# Altium PCB PCB_Steering_Wheel_REDO.PcbDoc
Units mm, origin at the board's own origin, x right, y up, seen from the top; angles counter-clockwise.
Board outline 165.1 x 52.45 mm, 2 copper layers (Top Layer, Bottom Layer); 9 components, 7 nets, 38 pads, 8 vias.
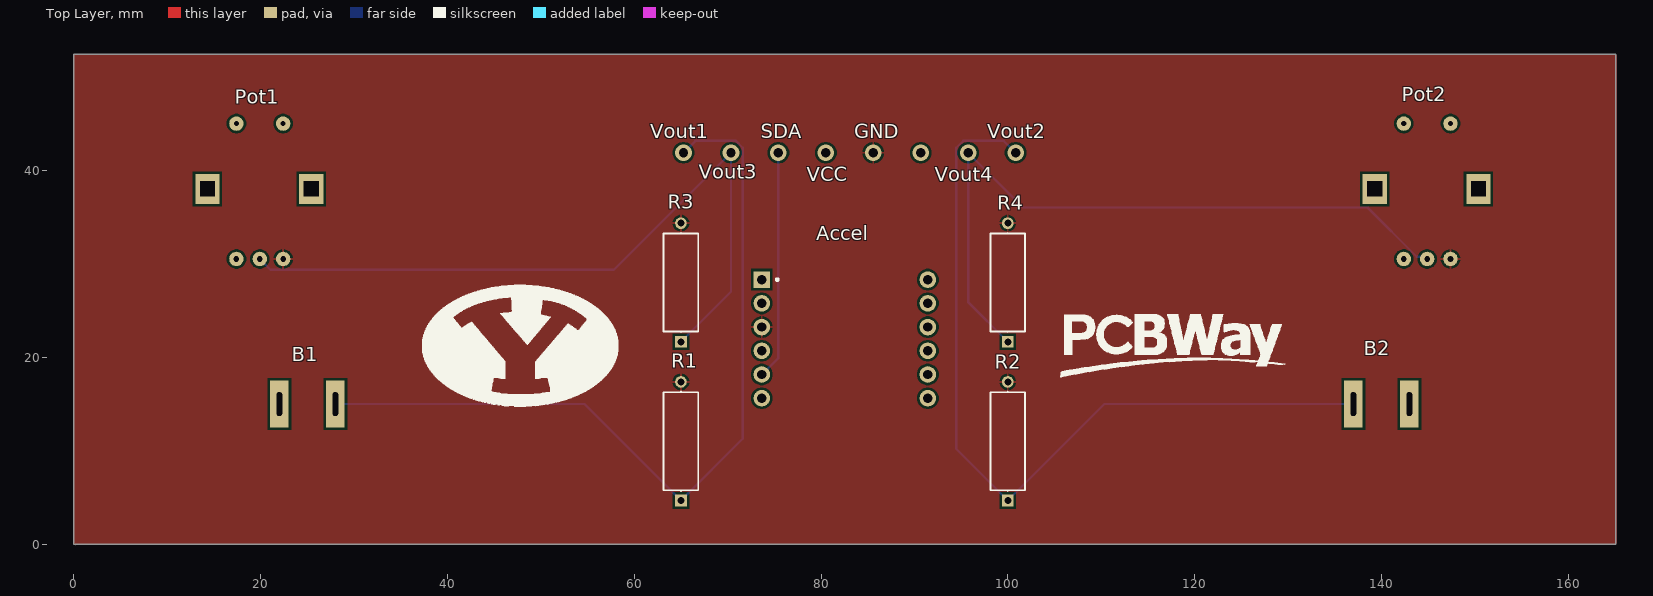
[diagram p0: Top Layer view]
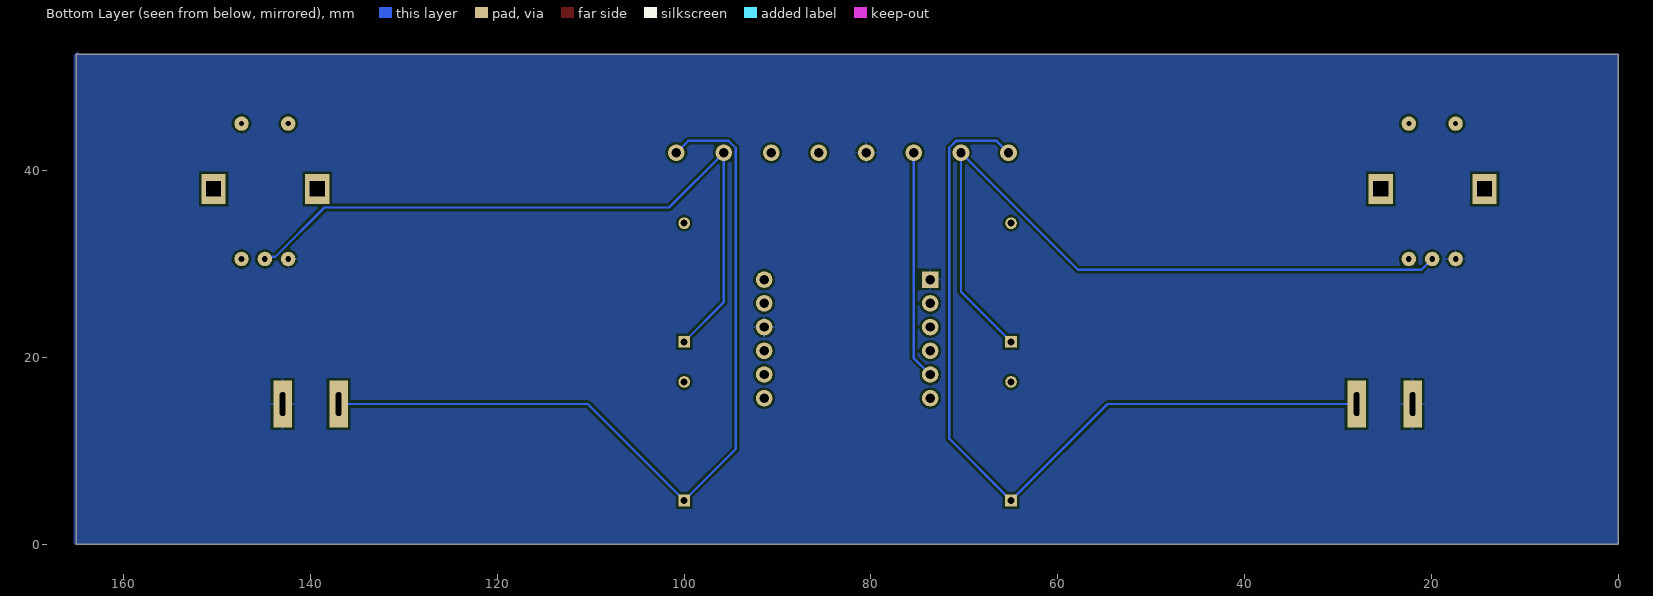
[diagram p1: Bottom Layer view, seen from below]

## Layer stack, top to bottom
Top Solder: solder mask 0.0102, Solder Resist, Dk 3.5
Top Layer: signal copper 0.0356
Dielectric 1: dielectric 0.32, FR-4, Dk 4.8
Bottom Layer: signal copper 0.0356
Bottom Solder: solder mask 0.0102, Solder Resist, Dk 3.5

## Board outline
0,0 0,52.451 165.1,52.451 165.1,0

## Design rules (kind name [scope] priority, off if disabled: settings)
Clearance [All] p1: gap=0.254 ignorepadtopadclearanceinfootprint=FALSE
PolygonConnect [All] p1: connectstyle=Relief reliefconductorwidth=0.254 reliefentries=4 polygonreliefangle="90 Angle" airgapwidth=0.254
RoutingVias [All] p1: holewidth=0.711 width=1.27 viastyle="Through Hole" minholewidth=0.711 minwidth=1.27 maxholewidth=0.711 maxwidth=1.27
SolderMaskExpansion [All] p1: expansion=0.102 istentingtop=FALSE
SupplyNets "Schematic Supply Nets_1" [InNet('GND')] p1: voltage=0.000
SupplyNets "Schematic Supply Nets" [InNet('VCC')] p2: voltage=0.000
Width [All] p1: maxlimit=0.254 minlimit=0.254 preferedwidth=0.254
30 further rules are at their usual default settings.

## Components (designator, comment, footprint, x,y, rotation, side; value= is the part's Value field where it differs from the comment)
Accel "Adafruit BN0085" "Adafruit BN0085-Footprint-1" 71.12,34.671 r270 top
B1 "PB6B2HS2M1CAL00" PB6B2HS2M1CAL00-Footprint-1 25,15 r0 top
B2 "PB6B2HS2M1CAL00" PB6B2HS2M1CAL00-Footprint-1 140,15 r180 top
Pot1 "PEC11H-4015F-S0016" PEC11H-4015F-S0016-Footprint-1 20,38 r0 top
Pot2 "PEC11H-4015F-S0016" PEC11H-4015F-S0016-Footprint-1 145,38 r0 top
R1 "10k" FP-H45K0BAA-MFG 65,11.016 r90 top
R2 "10k" FP-H45K0BAA-MFG 100,11.016 r90 top
R3 "10k" FP-H45K0BAA-MFG 65,28.016 r90 top
R4 "10k" FP-H45K0BAA-MFG 100,28.016 r90 top

## Footprints (in the part's own frame and the unit in brackets; to place one, negate y for a bottom-side part, rotate by r counter-clockwise, add the part's x,y. Pads: shape width x height; smd on the part's side, far side on the other; paste and mask are expansions set on the pad)
"Adafruit BN0085-Footprint-1" [mil]
  rect 70x70 hole 39.37: 1(250,100)
  round 70 hole 39.37: 2(350,100) 3(450,100) 4(550,100) 5(650,100) 6(750,100) 7(250,800) 8(350,800) 9(450,800) 10(550,800) 11(650,800) 12(750,800)
  silkscreen extent 245,160 255,170
FP-H45K0BAA-MFG [mm]
  rect 1.25x1.25 hole 0.75 paste-2539.97 mask+0: 1(-6.35,0)
  round 1.25 hole 0.75 paste-2539.97 mask+0: 2(6.35,0)
  silkscreen extent -5.33,-1.85 5.33,1.85, body extent -7.07,-1.95 7.07,1.95, height 0.25
PB6B2HS2M1CAL00-Footprint-1 [mm]
  rect 2x5 hole 0.6 slot 2.54 at 90 deg: 1(-3,0) 2(3,0)
PEC11H-4015F-S0016-Footprint-1 [mm]
  round 1.55 hole 0.6: 1(-2.596,-7.469) 2(-0.096,-7.469) 3(2.404,-7.469)
  round 1.55 hole 0.56: 5(-2.596,7.031) 6(2.404,7.031)
  rect 2.6x3.2 hole 1.6 square: 7(-5.696,0.031) 8(5.404,0.031)

## Part data
Accel: library part CMP-010-00024-4, "9DoF Accel/Gyro"
B1 B2: library part CMP-00028-00007-7, "Standard PB6 Black Panel Mount Front Pushbutton Switch 125mA AC 200mA DC 125V -30C~85C"
Pot1 Pot2: library part CMP-00028-00009-3, "INCREMENTAL ENCODER, 2CH, 60 RPM, 16 PPR; Encoder Technology: Mechanical; Type: Incremental;", Mounting Technology="Through Hole,Panel,PCB"
R1 R2 R3 R4: library part CMP-03212-000004-1, "RES 5.00K OHM 1/2W 0.1% AXIAL", Case/Package=Axial, Max Operating Temperature=155°C, Max Power Dissipation=500mW, Min Operating Temperature=-55°C, Number of Resistors=1, Package Quantity=250, Resistance=5kR, Resistor Type="Thin Film", Temperature Coefficient=5ppm/°C, Tolerance=0.1%, Voltage Rating=350V, Contact Plating=Tin, Diameter=3.7mm, ELV=Compliant, Lead Diameter=0.6mm, Length=10mm, Mount=Axial, Number of Terminations=2, Packaging=Bulk, Power Rating=500mW, Radiation Hardening=No, RoHS Compliant=Yes, Series="Holco, Holsworthy", Termination=Axial, Weight=0.01411oz

## Via types
v1: diameter 1.778, hole 1, Top Layer to Bottom Layer, 8 vias

## Nets (pads, with @x,y where several pads share a name; then routed paths per layer and width w, separated by ;. In a path a pad name is that pad's centre, name@x,y a point inside that pad or via, vN(x,y) a via of type N, cw(c..) or ccw(c..) an arc to the next point about the centre after c; other vN are vias at no path point)
GND: Accel.3 Pot1.3 Pot2.3 R1.2 R2.2 R3.2 R4.2
  other v1: 85.598,41.91
SDA: Accel.5 | length 24.2
  Bottom Layer w0.254: Accel.5 75.438,19.939 v1@75.438,41.656
  other v1: 75.438,41.91
VCC: Accel.1 Accel.9 B1.1 B2.1 Pot1.1 Pot2.1
  other v1: 80.518,41.91
Vout1: B1.2 R1.1 | length 89
  Bottom Layer w0.254: B1.2 54.666,15 R1.1 71.628,11.294 71.628,42.436 70.884,43.18 66.548,43.18 v1(65.278,41.91)
Vout2: B2.2 R2.1 | length 88.2
  Bottom Layer w0.254: v1@100.584,42.164 99.568,43.18 95.232,43.18 94.488,42.436 94.488,10.178 R2.1 110.334,15 B2.2
  other v1: 100.838,41.91
Vout3: Pot1.2 R3.1 | length 78.6
  Bottom Layer w0.254: Pot1.2 21.06,29.375 57.823,29.375 v1(70.358,41.91) 70.358,27.024 R3.1
Vout4: Pot2.2 R4.1 | length 75.9
  Bottom Layer w0.254: R4.1 95.758,25.908 v1(95.758,41.91) 101.618,36.05 138.52,36.05 143.791,30.779 144.656,30.779 Pot2.2
pads on no net: Accel.2 Accel.4 Accel.6 Accel.7 Accel.8 Accel.10 Accel.11 Accel.12 Pot1.5 Pot1.6 Pot1.7 Pot1.8 Pot2.5 Pot2.6 Pot2.7 Pot2.8
copper on no net:
  other v1: 90.678,41.91

## Polygon pours and split planes (outlines as drawn)
GND on Top Layer "NONET_L-01_P-001" (solid, pour order 0): 0,-0.127 0,52.324 165.227,52.324 165.227,0.127 165.1,0
VCC on Bottom Layer "NONET_L-01_P-001" (solid, pour order 1): 0,0 0,52.451 164.719,52.451 164.973,52.705 165.354,52.324 165.354,-0.127

## Silkscreen, mask and mechanical layers (free items; w line width, h text height)
Top Overlay:
  drawing of 7 lines, arcs and shapes, not listed
  text "Vout1" at 61.722,43.434 h1.52
  text "SDA" at 73.533,43.434 h1.52
  text "GND" at 83.566,43.434 h1.52
  text "Vout2" at 97.79,43.434 h1.52
  text "Vout3" at 66.929,39.116 h1.52
  text "VCC" at 78.486,38.862 h1.52
  text "Vout4" at 92.202,38.862 h1.52